# EAGLE board witch-pulse1 (EAGLE 6.4)
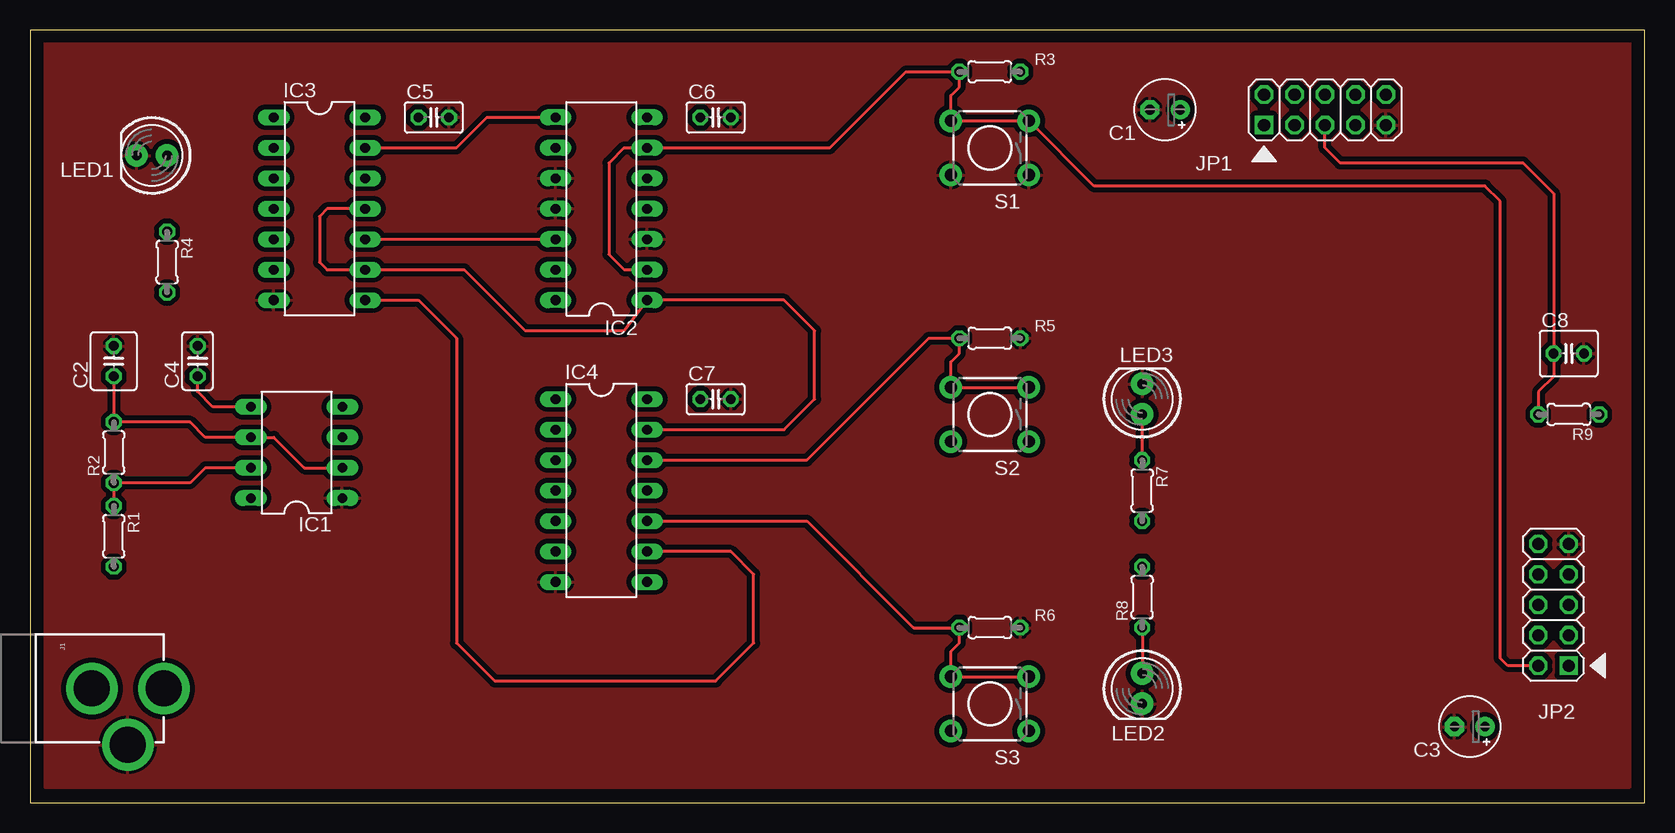
[diagram p0: board, top side]
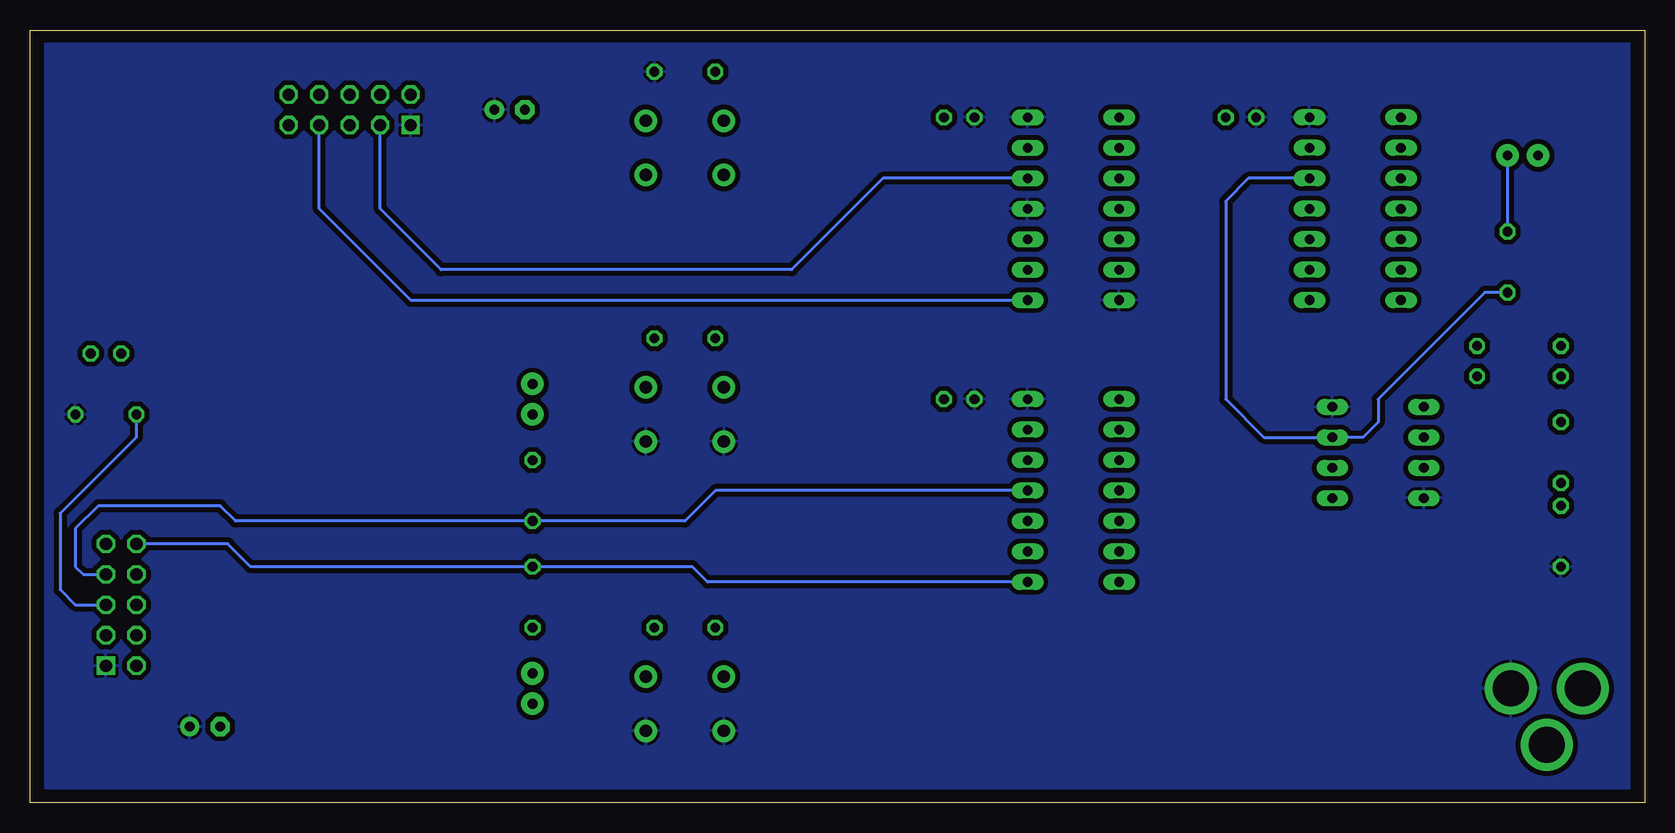
[diagram p1: board, bottom side, seen from below]

Size 134.6 x 64.44 mm. Coordinates in mm from the lower left corner, seen from the top.
Outline: 0,0 134.6,0 134.6,64.44 0,64.44 0,0
Copper layers (1*16): Top 0.035mm / dielectric 1.5mm / Bottom 0.035mm
Design rules "default": minimum track width 10mil, minimum drill 24mil, track to track 8mil, track to pad 8mil, pad to pad 8mil, via to via 8mil, smd to smd 8mil, copper to edge 40mil, drill to drill 8mil, minimum pad ring 10mil, minimum via ring 8mil, stop-mask expansion 4mil, vias tented up to drill 0mil, thermal gap 10mil

## Footprints (pad centres in the part's own frame; a part is rotated, then mirrored left to right if it is on the bottom)
E2,5-5 = drill 0.813 pad 1.6: + -1.27,0 | drill 0.813 pad 1.6 octagon: - 1.27,0
C025-040X050 = drill 0.813 octagon: 1 -1.27,0; 2 1.27,0
C025-025X050 = drill 0.813 octagon: 1 -1.27,0; 2 1.27,0
DIL-08 = drill 0.813 long: 1 -3.81,-3.81; 2 -1.27,-3.81; 3 1.27,-3.81; 4 3.81,-3.81; 5 3.81,3.81; 6 1.27,3.81; 7 -1.27,3.81; 8 -3.81,3.81
DIL14 = drill 0.813 long: 1 -7.62,-3.81; 2 -5.08,-3.81; 3 -2.54,-3.81; 4 0,-3.81; 5 2.54,-3.81; 6 5.08,-3.81; 7 7.62,-3.81; 8 7.62,3.81; 9 5.08,3.81; 10 2.54,3.81; 11 0,3.81; 12 -2.54,3.81; 13 -5.08,3.81; 14 -7.62,3.81
POWER_JACK_PTH = drill 2.997 pad 4.318: GND 0,7.7; GNDBREAK 4.7,10.7; PWR 0,13.7
2X05 = drill 1.016 square: 1 -5.08,-1.27 | drill 1.016 octagon: 2 -5.08,1.27; 3 -2.54,-1.27; 4 -2.54,1.27; 5 0,-1.27; 6 0,1.27; 7 2.54,-1.27; 8 2.54,1.27; 9 5.08,-1.27; 10 5.08,1.27
LED5MM = drill 0.813 pad 1.88: A -1.27,0; K 1.27,0
0204/5 = drill 0.813 octagon: 1 -2.54,0; 2 2.54,0
TACTILE-PTH = drill 1.016 pad 1.88: 1 -3.251,2.261; 2 3.251,2.261; 3 -3.251,-2.261; 4 3.251,-2.261

## Placement (x,y rotation side)
C1  [E2,5-5]  94.61,57.78 180 top
C2  [C025-040X050]  6.99,36.83 90 top
C3  [E2,5-5]  120.02,6.35 180 top
C4  [C025-025X050]  13.97,36.83 90 top
C5  [C025-025X050]  33.66,57.15 0 top
C6  [C025-025X050]  57.15,57.15 0 top
C7  [C025-025X050]  57.15,33.66 0 top
C8  [C025-040X050]  128.27,37.47 0 top
IC1  NE555  [DIL-08]  22.23,29.21 90 top
IC2  74LS73N  [DIL14]  47.62,49.53 90 top
IC3  74S08N  [DIL14]  24.13,49.53 270 top
IC4  7432N  [DIL14]  47.62,26.04 270 top
J1  POWER_JACKPTH  [POWER_JACK_PTH]  -2.54,9.53 270 top
JP1  [2X05]  107.95,57.78 0 top
JP2  [2X05]  127,16.51 90 top
LED1  [LED5MM]  10.16,53.98 180 top
LED2  [LED5MM]  92.71,9.53 270 top
LED3  [LED5MM]  92.71,33.66 90 top
R1  [0204/5]  6.99,22.23 270 top
R2  [0204/5]  6.99,29.21 90 top
R3  [0204/5]  80.01,60.96 0 top
R4  330R  [0204/5]  11.43,45.09 270 top
R5  [0204/5]  80.01,38.73 180 top
R6  [0204/5]  80.01,14.61 180 top
R7  330R  [0204/5]  92.71,26.04 270 top
R8  330R  [0204/5]  92.71,17.14 90 top
R9  [0204/5]  128.27,32.38 180 top
S1  [TACTILE-PTH]  80.01,54.61 180 top
S2  [TACTILE-PTH]  80.01,32.38 180 top
S3  [TACTILE-PTH]  80.01,8.26 180 top

## Library data of the parts
C1-C8 R1-R9 = resistor
IC1 = st-microelectronics; MF: Arrow Electronics; MPN: NE555N; OC_FARNELL: 1467742; OC_NEWARK: 89K1486
IC2-IC4 = 74xx-us
J1 = SparkFun-Connectors; PROD_ID: PRT-00119
JP1 JP2 = pinhead
LED1-LED3 = SparkFun-LED
S1-S3 = SparkFun-Electromechanical

## Nets
9A_PULSE: IC3.8 IC4.9
10A_PULSE: IC2.1 IC3.9 IC3.11 IC4.13 JP1.7
DK_RESET: C8.1 JP1.5 JP2.5 R9.2
N$2: IC1.3 IC3.12 R4.2
N$4: IC4.8 JP2.10 R8.2
N$5: IC2.8 IC3.13
N$6: IC4.12 R5.2 S2.3 S2.4
N$7: IC2.12 IC3.10
N$9: IC4.10 R6.2 S3.3 S3.4
N$10: IC1.7 R1.1 R2.1
N$12: IC2.5 JP1.3
N$13: C2.1 IC1.2 IC1.6 R2.2
N$14: C4.1 IC1.5
N$15: LED1.A R4.1
N$17: LED3.A R7.1
N$18: LED2.A R8.1
N$19: IC4.11 JP2.7 R7.2
RESET: IC2.2 IC2.6 JP2.2 R3.1 S1.3 S1.4
VDD: C1.+ C3.+ C5.1 C6.1 C7.1 IC1.4 IC1.8 IC2.4 IC2.7 IC2.14 IC3.14 IC4.14 J1.PWR JP1.1 JP2.1 R1.2 R3.2 R9.1 S2.1 S2.2 S3.1 S3.2
VSS: C1.- C2.2 C3.- C4.2 C5.2 C6.2 C7.2 C8.2 IC1.1 IC2.3 IC2.10 IC2.11 IC3.7 IC4.7 J1.GNDBREAK JP1.9 JP2.9 LED1.K LED2.K LED3.K R5.1 R6.1 S1.1 S1.2

## Tracks (layer width: path | path; a pad name or v marks a point on that pad's centre or on a via)
9A_PULSE
  Top 0.254: IC3.8 32.38,41.91 35.56,38.73 35.56,13.34 38.73,10.16 57.15,10.16 60.33,13.34 60.33,19.05 58.42,20.95 IC4.9
10A_PULSE
  Top 0.254: IC3.11 24.77,49.53 24.13,48.9 24.13,45.09 24.77,44.45 IC3.9 36.2,44.45 41.27,39.37 49.53,39.37 IC2.1 62.87,41.91 65.41,39.37 65.41,33.66 62.87,31.11 IC4.13
  Bottom 0.254: IC2.1 102.87,41.91 110.49,49.53 JP1.7
DK_RESET
  Top 0.254: R9.2 125.73,34.29 127,35.56 C8.1 127,50.8 124.46,53.34 109.22,53.34 107.95,54.61 JP1.5
  Bottom 0.254: JP2.5 130.81,16.51 132.08,17.78 132.08,24.13 125.73,30.48 R9.2
N$2
  Bottom 0.254: IC3.12 33.02,52.07 34.92,50.16 34.92,33.66 31.75,30.48 IC1.3 23.5,30.48 22.23,31.75 22.23,33.66 13.34,42.55 R4.2
N$4
  Bottom 0.254: IC4.8 78.11,18.41 79.38,19.68 R8.2 116.2,19.68 118.11,21.59 JP2.10
N$5
  Top 0.254: IC3.13 35.56,54.61 38.1,57.15 IC2.8
N$6
  Top 0.254: IC4.12 64.77,28.57 74.93,38.73 R5.2 77.47,37.47 76.76,36.75 S2.4 S2.3
N$7
  Top 0.254: IC3.10 IC2.12
N$9
  Top 0.254: S3.3 S3.4 76.76,12.62 77.47,13.34 R6.2 73.66,14.61 64.77,23.5 IC4.10
N$10
  Top 0.254: IC1.7 14.61,27.94 13.34,26.67 R2.1 R1.1
N$12
  Bottom 0.254: IC2.5 63.5,52.07 71.12,44.45 100.33,44.45 105.41,49.53 JP1.3
N$13
  Top 0.254: C2.1 R2.2 13.34,31.75 14.61,30.48 IC1.6 20.32,30.48 22.86,27.94 IC1.2
N$14
  Top 0.254: IC1.5 15.24,33.02 13.97,34.29 C4.1
N$15
  Bottom 0.254: R4.1 LED1.A
N$17
  Top 0.254: R7.1 LED3.A
N$18
  Top 0.254: R8.1 LED2.A
N$19
  Bottom 0.254: IC4.11 77.47,26.04 80.01,23.5 R7.2 117.47,23.5 118.75,24.77 128.91,24.77 130.81,22.86 130.81,19.68 130.18,19.05 JP2.7
RESET
  Top 0.254: IC2.2 49.53,44.45 48.26,45.72 48.26,53.34 49.53,54.61 IC2.6 66.67,54.61 73.03,60.96 R3.1 77.47,59.69 76.76,58.98 S1.4 S1.3 88.7,51.44 121.28,51.44 122.56,50.16 122.56,12.06 123.19,11.43 JP2.2
VDD
  pour Bottom (isolate 0.406): 1.27,63.5 133.35,63.5 133.35,1.27 1.27,1.27
VSS
  pour Top (isolate 0.406): 1.27,63.5 133.35,63.5 133.35,1.27 1.27,1.27